# EAGLE board led-driver-v1 (EAGLE 6.1)

Size 48.88 x 49.2 mm. Coordinates in mm from the lower left corner, seen from the top.
Outline: 0,0 48.88,0 48.88,49.2 0,49.2 0,0
Copper layers (1*16): Top 0.035mm / dielectric 1.5mm / Bottom 0.035mm
Design rules: minimum track width 6mil, minimum drill 12mil, track to track 6mil, track to pad 6mil, pad to pad 6mil, via to via 6mil, smd to smd 0mil, copper to edge 10mil, drill to drill 10mil, minimum pad ring 10mil, minimum via ring 6mil, stop-mask expansion 2mil, vias tented up to drill 100mil, thermal gap 10mil
Net classes: 0 default: width 0.305 mm; 1 power: width 0.457 mm; 2 i2c: width 0.457 mm; 3 fine: width 0.305 mm
vRestrict: area 19,16.5 to 31.8,20.3; area 19,25.4 to 31.8,29.2; area 27.9,16.5 to 31.8,29.2; area 19,16.5 to 22.9,29.2; area 39.4,33 to 44.5,38.1

## Footprints (pad centres in the part's own frame; a part is rotated, then mirrored left to right if it is on the bottom)
C1206 = smd 1.6 x 1.8: 1 -1.4,0; 2 1.4,0
TC2030-MCP = smd 0.787 x 0.787: 5V 1.27,0.635; GND 3.81,0.635; MISO 1.27,-0.635; MOSI 2.54,0.635; RESET 3.81,-0.635; SCK 2.54,-0.635 | hole 0.889: 0,0; 5.08,-1.016; 5.08,1.016 | hole 2.375: 0,2.54; 0,-2.54; 3.175,-2.54; 3.175,2.54
LED-1206 = smd 1.2 x 1.4: A -1.5,0; C 1.5,0
TQFP32-08 = smd 1.27 x 0.559: 1 -4.293,2.8; 2 -4.293,2; 3 -4.293,1.2; 4 -4.293,0.4; 5 -4.293,-0.4; 6 -4.293,-1.2; 7 -4.293,-2; 8 -4.293,-2.8; 17 4.293,-2.8; 18 4.293,-2; 19 4.293,-1.2; 20 4.293,-0.4; 21 4.293,0.4; 22 4.293,1.2; 23 4.293,2; 24 4.293,2.8 | smd 0.559 x 1.27: 9 -2.8,-4.293; 10 -2,-4.293; 11 -1.2,-4.293; 12 -0.4,-4.293; 13 0.4,-4.293; 14 1.2,-4.293; 15 2,-4.293; 16 2.8,-4.293; 25 2.8,4.293; 26 2,4.293; 27 1.2,4.293; 28 0.4,4.293; 29 -0.4,4.293; 30 -1.2,4.293; 31 -2,4.293; 32 -2.8,4.293
RJ12-RIGHTANGLE-I2C = drill 0.8 pad 1.3: +5V -1.54,4.84; +12V 2.54,4.84; GND1 -2.54,2.3; GND2 -0.5,2.3; SCL 1.54,2.3; SDA 0.5,4.84 | hole 2.36: -6,0; 6,0
CHIP-LED0603 = smd 0.8 x 0.8: A 0,-0.75; C 0,0.75
0603-RES = smd 1.1 x 1: 1 -0.85,0; 2 0.85,0
M1206 = smd 1.6 x 2: 1 -1.4,0; 2 1.4,0
22-23-2061 = drill 1 long: 1 -6.35,0; 2 -3.81,0; 3 -1.27,0; 4 1.27,0; 5 3.81,0; 6 6.35,0

## Placement (x,y rotation side)
C1  0.1uF  [C1206]  26.67,32.38 180 top
C2  0.1uF  [C1206]  20.32,32.38 0 top
C3  10uF  [C1206]  20.32,36.2 0 top
CON2  [TC2030-MCP]  40.01,35.56 0 top
D1  1N581D1206  [LED-1206]  13.97,32.7 0 top
D2  1N581D1206  [LED-1206]  13.97,35.88 0 top
IC1  MEGA8-AI  [TQFP32-08]  25.4,22.86 90 top
J1  RJ12RIGHTANGLE-I2C  [RJ12-RIGHTANGLE-I2C]  6.35,22.86 270 top
J2  RJ12RIGHTANGLE-I2C  [RJ12-RIGHTANGLE-I2C]  43.18,22.86 90 top
LED7  [CHIP-LED0603]  31.11,13.34 270 top
R7  10k  [0603-RES]  27.94,13.34 0 top
R8  10k  [M1206]  26.67,36.2 0 top
X6  [22-23-2061]  13.97,43.18 0 top
X7  [22-23-2061]  35.56,43.18 0 top
X8  [22-23-2061]  35.56,6.35 180 top
X9  [22-23-2061]  13.97,6.35 180 top

## Library data of the parts
C1-C3 R8 = resistor
CON2 D1 D2 J1 J2 = lpatiny
IC1 = atmel; MPN: ATMEGA8-16AU; OC_FARNELL: 9171371; OC_NEWARK: 73M8863
LED7 = adafruit
R7 = SparkFun
X6-X9 = con-molex; MF: MOLEX; MPN: 22-23-2061; OC_FARNELL: 1462922; OC_NEWARK: 27C1933

## Nets
5V_A [i2c]: CON2.5V D1.A
5V_B [power]: D2.A J1.+5V J2.+5V
+5V [power]: C1.1 C2.1 C3.1 D1.C D2.C IC1.4 IC1.6 IC1.18 R7.1 R8.2
A0: IC1.23 X9.1
A1: IC1.24 X9.2
A2: IC1.25 X9.3
A3: IC1.26 X9.4
A6: IC1.19
A7: IC1.22
D0: IC1.30 X6.1
D1: IC1.31 X6.2
D2: IC1.32 X6.3
D3: IC1.1 X6.4
D4: IC1.2 X6.5
D5: IC1.9 X7.1
D6: IC1.10 X7.2
D7: IC1.11 X7.3
D8: IC1.12 X7.4
D9: IC1.13 X7.5
D10: IC1.14 X8.1
GND [power]: C2.2 C3.2 CON2.GND IC1.3 IC1.5 IC1.21 J1.GND1 J1.GND2 J2.GND1 J2.GND2 LED7.C X6.6 X7.6 X8.6 X9.6
MISO: CON2.MISO IC1.16 X8.3
MOSI: CON2.MOSI IC1.15 X8.2
N$4: C1.2 IC1.20
N$13: J1.+12V J2.+12V
N$15: LED7.A R7.2
PB6: IC1.7 X8.5
PB7: IC1.8 X9.5
RESET: CON2.RESET IC1.29 R8.1
SCK: CON2.SCK IC1.17 X8.4
SCL [i2c]: IC1.28 J1.SCL J2.SCL
SDA [i2c]: IC1.27 J1.SDA J2.SDA

## Tracks (layer width: path | path; a pad name or v marks a point on that pad's centre or on a via)
5V_A  (1 unrouted)
5V_B  (2 unrouted)
+5V  (9 unrouted)
A0  (1 unrouted)
A1  (1 unrouted)
A2  (1 unrouted)
A3  (1 unrouted)
D0  (1 unrouted)
D1  (1 unrouted)
D2  (1 unrouted)
D3  (1 unrouted)
D4  (1 unrouted)
D5  (1 unrouted)
D6  (1 unrouted)
D7  (1 unrouted)
D8  (1 unrouted)
D9  (1 unrouted)
D10  (1 unrouted)
GND  (14 unrouted)
MISO  (2 unrouted)
MOSI  (2 unrouted)
N$4  (1 unrouted)
N$13  (1 unrouted)
N$15  (1 unrouted)
PB6  (1 unrouted)
PB7  (1 unrouted)
RESET  (2 unrouted)
SCK  (2 unrouted)
SCL  (2 unrouted)
SDA  (2 unrouted)

## Text on the board
tNames: D0 | D1 | D2 | D3 | D4 | GND | D5 | D6 | D7 | D8 | D9 | GND | GND | PB7 | A3 | A2 | A1 | A0 | GND | PB6 | D13 | D12 | D11 | D10